# EAGLE board diseño con fuente 9v-12v (EAGLE 7.6.0)

Size 73.58 x 63.39 mm. Coordinates in mm from the lower left corner, seen from the top.
Outline: 0,0 56.82,0 56.82,53.33 0,53.33 0,0
Copper layers (1*16): Top 0.035mm / dielectric 1.5mm / Bottom 0.035mm
Design rules "default": minimum track width 10mil, minimum drill 24mil, track to track 8mil, track to pad 8mil, pad to pad 8mil, via to via 8mil, smd to smd 8mil, copper to edge 40mil, drill to drill 8mil, minimum pad ring 10mil, minimum via ring 8mil, stop-mask expansion 4mil, vias tented up to drill 0mil, thermal gap 10mil

## Footprints (pad centres in the part's own frame; a part is rotated, then mirrored left to right if it is on the bottom)
DC-POWER = drill 0.889 pad 2.54 octagon: + 0,2.54; - 0,-2.54
LED5MM = drill 0.813 octagon: A -1.27,0; K 1.27,0
PIEZO-22MM = drill 1 pad 2.54: P$1 -5,0; P$2 5,0
0207/10 = drill 0.813 octagon: 1 -5.08,0; 2 5.08,0
TO220 = drill 1.118 long: 1 -2.54,-6.35; 2 0,-6.35; 3 2.54,-6.35 | hole 3.302: 0,11.176
ARDUINO_UNO = drill 1.016 pad 1.88: 0 63.5,50.8; 1 60.96,50.8; 2 58.42,50.8; 3 55.88,50.8; 3.3V 35.56,2.54; 4 53.34,50.8; 5 50.8,50.8; 5V 38.1,2.54; 6 48.26,50.8; 7 45.72,50.8; 8 41.656,50.8; 9 39.116,50.8; 10 36.576,50.8; 11 34.036,50.8; 12 31.496,50.8; 13 28.956,50.8; A0 50.8,2.54; A1 53.34,2.54; A2 55.88,2.54; A3 58.42,2.54; A4 60.96,2.54; A5 63.5,2.54; AREF 23.876,50.8; GND 26.416,50.8; GND. 43.18,2.54; GND.. 40.64,2.54; I/OREF 30.48,2.54; N/C 27.94,2.54; RESET 33.02,2.54; SCL 18.796,50.8; SDA 21.336,50.8; VIN 45.72,2.54 | hole 3.2: 66.04,7.62; 66.04,35.56; 15.24,50.8; 13.97,2.54

## Placement (x,y rotation side)
BAT9v ó 12v  [DC-POWER]  5,124.38 0 top  (outside the outline)
DL.Apagado  [LED5MM]  5,98.98 0 top  (outside the outline)
DL.Encendido  [LED5MM]  5,86.28 0 top  (outside the outline)
PIEZOSirena.12V  [PIEZO-22MM]  5,111.68 0 top  (outside the outline)
RR.Led Rojo  330k‎Ω  [0207/10]  5,73.58 0 top  (outside the outline)
RR.Led Verde  330k‎Ω  [0207/10]  5,60.88 0 top
RR.Mampara  100k‎Ω  [0207/10]  5,35.48 0 top
RR.Puerta  100k‎Ω  [0207/10]  5,22.78 0 top
RR.Reja  100k‎Ω  [0207/10]  5,48.18 0 top
TSirena.IRF540  [TO220]  5,137.08 0 top  (outside the outline)
UArduino  [ARDUINO_UNO]  5,10.08 0 top

## Library data of the parts
BAT9v ó 12v DL.Apagado DL.Encendido PIEZOSirena.12V RR.Led Rojo RR.Led Verde RR.Mampara RR.Puerta RR.Reja TSirena.IRF540 UArduino = AUTODESK_CIRCUITS_BREADBOARD

## Nets
N$1: UArduino.5V
N$2: RR.Puerta.2 UArduino.4
N$3: RR.Mampara.2 UArduino.5
N$4: RR.Reja.2 UArduino.6
N$5: TSirena.IRF540.1 UArduino.10
N$6: PIEZOSirena.12V.P$2 TSirena.IRF540.2
N$7: DL.Encendido.K RR.Led Verde.2
N$8: RR.Led Verde.1 UArduino.12
N$9: DL.Apagado.K RR.Led Rojo.2
N$10: RR.Led Rojo.1 UArduino.13
N$11: BAT9v ó 12v.- DL.Apagado.A DL.Encendido.A RR.Mampara.1 RR.Puerta.1 RR.Reja.1 TSirena.IRF540.3 UArduino.GND.
N$12: BAT9v ó 12v.+ PIEZOSirena.12V.P$1

## Tracks (layer width: path | path; a pad name or v marks a point on that pad's centre or on a via)
N$2  (1 unrouted)
N$3  (1 unrouted)
N$4  (1 unrouted)
N$5  (1 unrouted)
N$6  (1 unrouted)
N$7  (1 unrouted)
N$8  (1 unrouted)
N$9  (1 unrouted)
N$10  (1 unrouted)
N$11  (7 unrouted)
N$12  (1 unrouted)